# Allegro board WaterDetector_ver1.0.0.brd
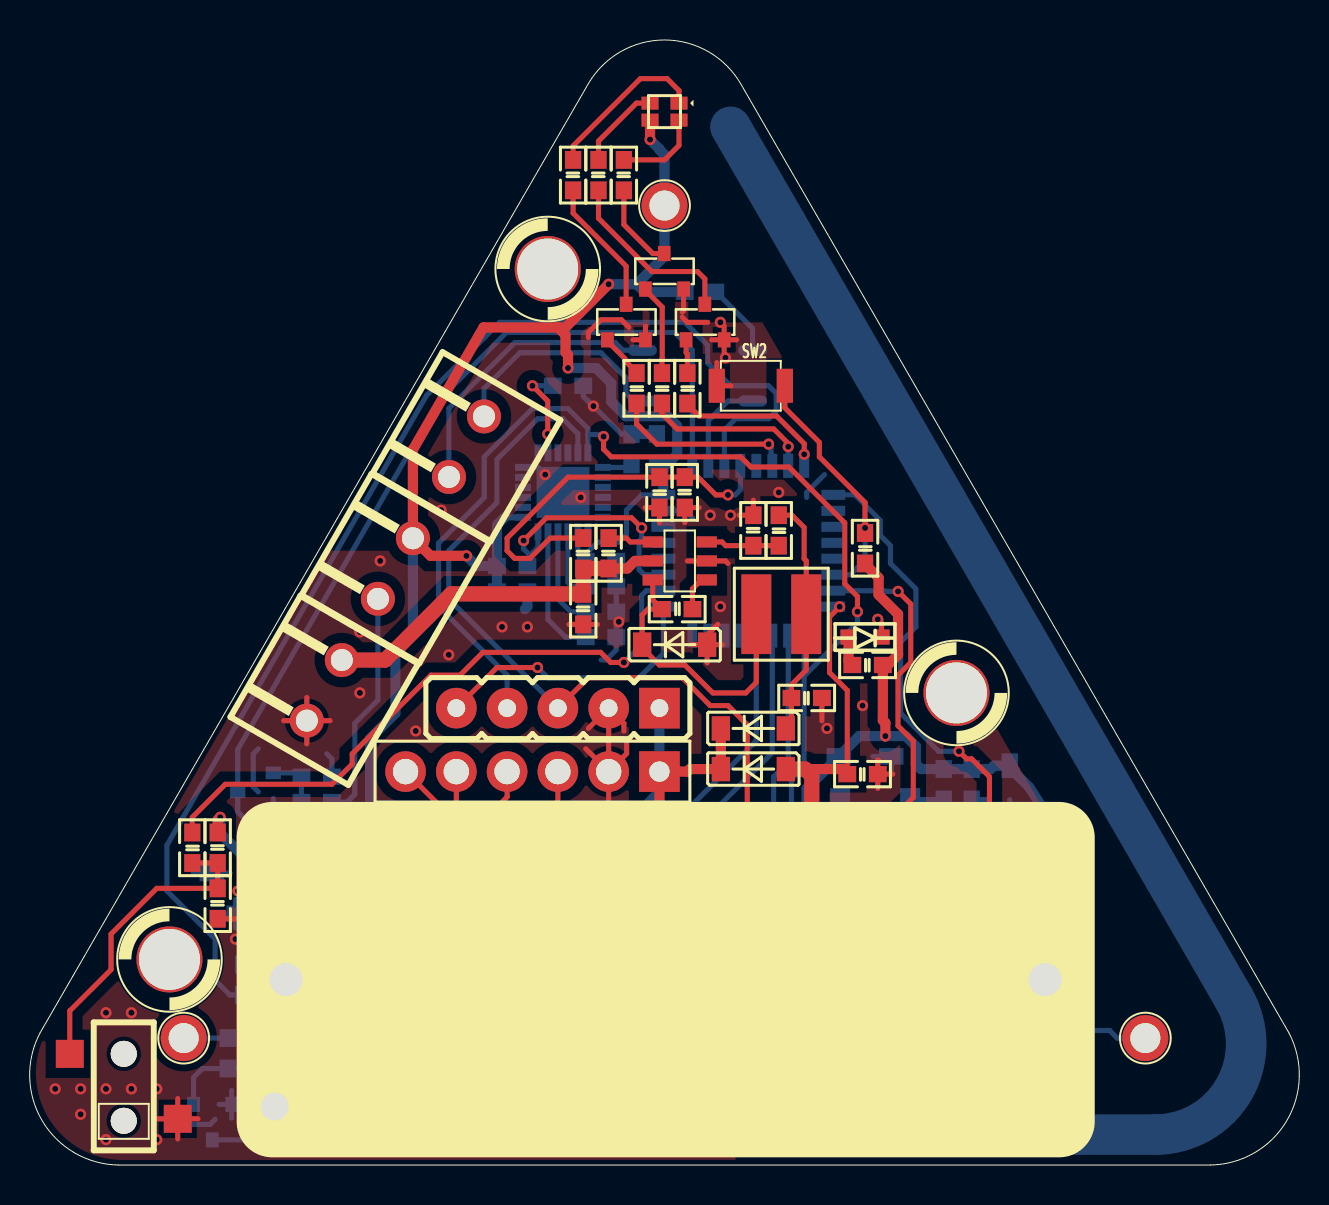
[diagram p0: board, top side]
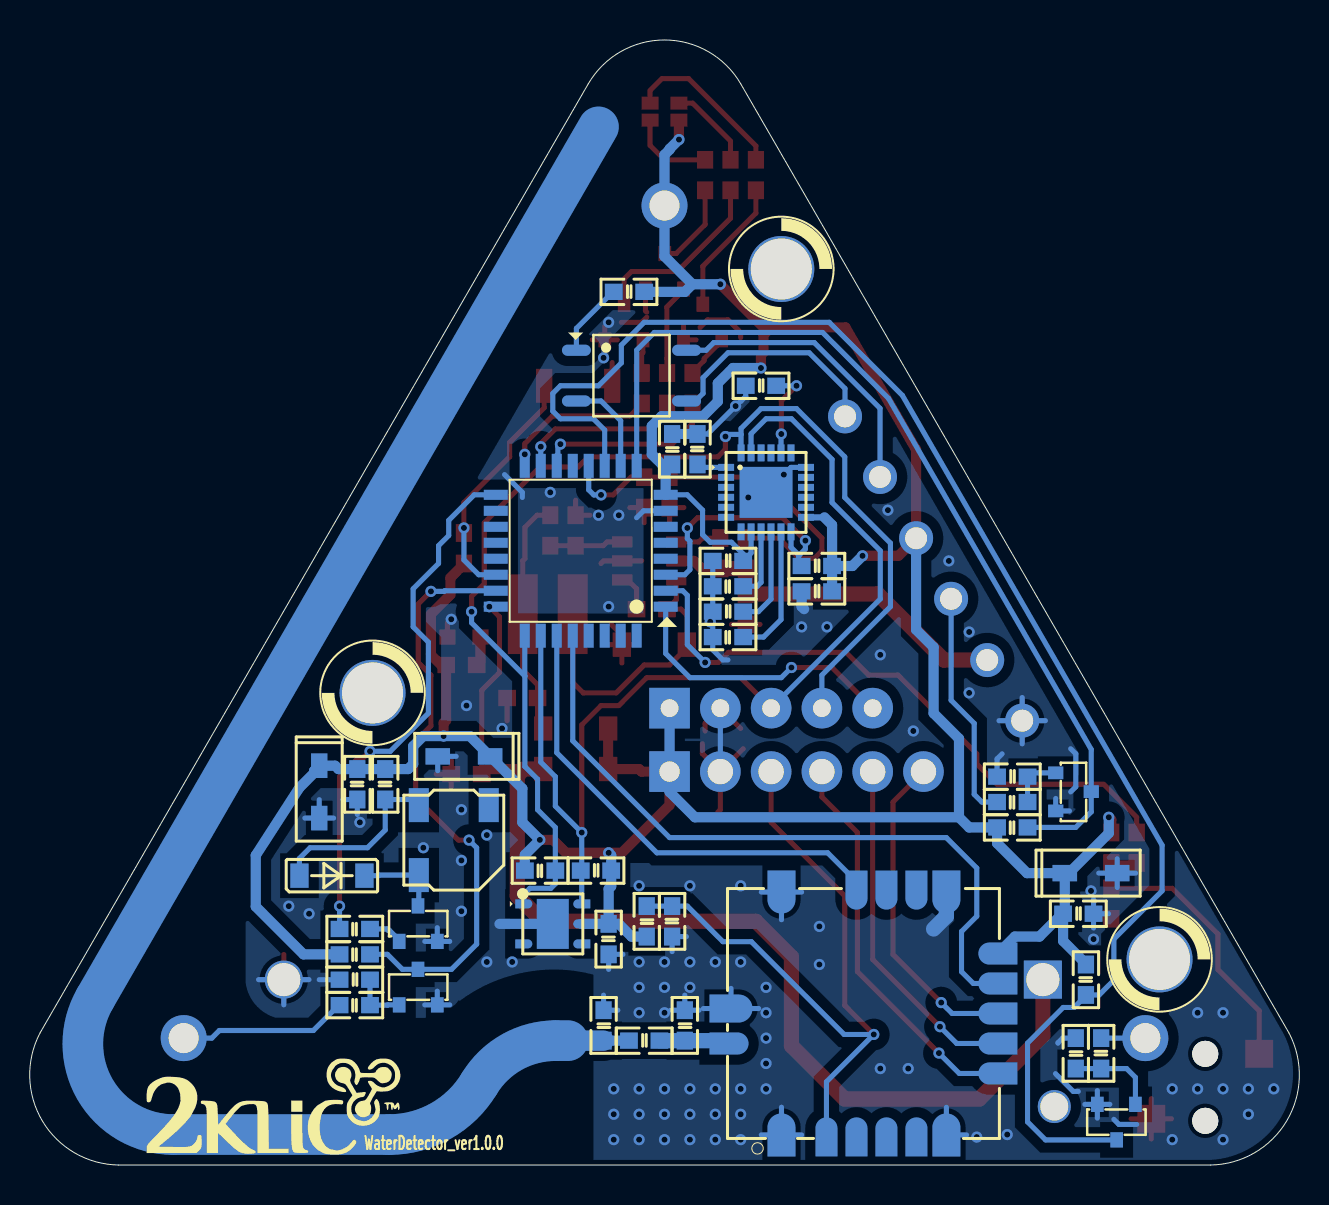
[diagram p1: board, bottom side, seen from below]

Outline 63.52 x 56.29 mm; copper layers: TOP, BOTTOM. Coordinates in mm from the lower left corner of the outline.
Outline path: 0.52,6.6 27.95,54.1 arc(31.76,56.29) 35.57,54.1 63,6.6 arc(62.88,2.2) 59.07,0 4.46,0 arc(0.64,2.2) 0.52,6.6

## Design rules (mm)
nets with their own width: min track width 0.254; nets GND

## Placement (name value [footprint] x y rotation side)
C1  10nF  [C0603]  32.4 27.81 180 top
C2  10uF/25V  [C0603]  27.7 27.81 270 top
C3  10uF  [C1206]  41.79 20.45 0 bottom
C4  22uF  [C0603]  38.87 23.37 0 top
C5  0.1uF  [C0603]  41.67 19.56 0 top
C6  0.1uF  [C0603]  11.06 12.57 0 bottom
C7  10uF  [C1206]  10.43 14.61 180 bottom
C8  10pF  [C0603]  30.75 6.99 90 bottom
C9  6pF  [C0603]  34.81 6.99 90 bottom
C10  0.1uF  [C0603]  31.38 35.81 90 bottom
C11  0.1uF  [C0603]  24.14 28.7 0 bottom
C12  2.2nF  [C0603]  26.94 38.99 0 bottom
C13  10nF  [C0603]  28.59 30.23 0 bottom
C14  0.1uF  [C0603]  28.59 27.69 0 bottom
C15  0.1uF  [C0603]  34.56 11.3 270 bottom
C16  0.1uF  [C0603]  47.13 19.05 270 bottom
C17  10u  [C1206]  49.03 18.67 270 bottom
C18  0.1uF  [C0603]  9.41 13.08 270 top
C19  0.1uF  [C0603]  32.78 33.66 270 top
C20  0.1uF  [C0603]  31.38 12.19 270 bottom
D1  1N5819  [SOD123]  36.21 21.84 0 top
D2  1N5819  [SOD123]  36.21 19.81 0 top
D3  1N5819  [SOD123]  32.27 26.04 0 top
D4  LED  [LED_0603]  41.79 26.42 0 top
D5  1N5819  [SOD123]  48.4 14.48 0 bottom
D6  Led GRB  [LED_RGB_0606]  31.76 52.7 270 top
H1  MetalLeg  [METALLEG]  31.76 48.01 0 top
H2  MetalLeg  [METALLEG]  7.71 6.35 0 top
H3  MetalLeg  [METALLEG]  55.82 6.35 0 top
J1  EXT_POWER_12V  [TERMINALBLOCK3P5MM]  14.74 23.75 240 top
J2  HEADER 6  [HEADER-6]  25.16 19.68 270 top
J3  EXT_LOAD  [TERMINALBLOCK3P5MM]  21.86 35.94 240 top
J4  EXT_SEN  [TERMINALBLOCK3P5MM]  18.3 29.84 240 top
J5  MCU PRG  [HEADER_5]  31.51 22.86 180 top
L1  4.7uH/1.5A  [IN4D_5X5]  37.6 27.56 270 top
L2  8.2nH  [C0603]  32.78 6.22 0 bottom
LS1  SPEAKER  [BUZZER_ST-0503]  42.3 16.26 270 bottom
MH1  HOLE 3mm  [MH_3MM_1]  25.92 44.83 0 top
MH2  HOLE 3mm  [MH_3MM_1]  7 10.29 0 top
MH3  HOLE 3mm  [MH_3MM_1]  46.37 23.62 0 top
NOREF  -  []  57.67 0.51 180 bottom
P1  CR123AHolder  [CR123A_HOLDER]  12.83 9.28 0 top
Q1  MMBT2222A  [SOT-23-3]  9.14 2.15 270 bottom
Q2  MMBT2222A  [SOT-23-3]  11.3 18.68 180 bottom
Q3  MMBT2222A  [SOT-23-3]  44.09 8.9 90 bottom
Q4  C1815  [SOT-23-3]  44.09 12.08 90 bottom
Q5  MMBT2222A  [SOT-23-3]  29.84 42.18 90 top
Q6  MMBT2222A  [SOT-23-3]  31.75 44.72 90 top
Q7  MMBT2222A  [SOT-23-3]  33.78 42.18 90 top
R1  10K  [R0603]  28.97 30.61 270 top
R2  49.9K  [R0603]  37.48 31.75 90 top
R3  240R  [R0603]  41.92 25.02 0 top
R4  9.53K  [R0603]  36.21 31.75 270 top
R5  330R  [R0603]  14.36 16.89 180 bottom
R6  330R  [R0603]  10.68 9.27 270 bottom
R7  330R  [R0603]  47.26 10.54 180 bottom
R8  1K  [R0603]  47.26 8 180 bottom
R9  1K  [R0603]  14.36 18.16 180 bottom
R10  1K  [R0603]  9.92 5.59 270 bottom
R11  1K  [R0603]  33.54 43.69 0 bottom
R12  10K  [R0603]  14.36 19.43 0 bottom
R13  10K  [R0603]  11.19 5.59 90 bottom
R14  10K  [R0603]  47.26 9.27 0 bottom
R16  10K  [R0603]  30.11 35.81 270 bottom
R17  10K  [R0603]  28.59 26.42 180 bottom
R19  10K  [R0603]  28.59 28.96 180 bottom
R20  10K  [R0603]  24.14 29.97 0 bottom
R21  10k  [R0603]  37.99 14.73 180 bottom
R22  10k  [R0603]  35.19 14.73 0 bottom
R23  27  [R0603]  45.73 19.05 270 bottom
R24  10K  [R0603]  9.41 15.88 270 top
R25  0R  [R0603]  8.14 15.88 90 top
R26  330R  [R0603]  47.26 11.81 180 bottom
R27  10K  [R0603]  41.79 30.86 90 top
R28  330R  [R0603]  27.19 49.53 270 top
R29  330R  [R0603]  29.73 49.53 270 top
R30  330R  [R0603]  28.46 49.53 270 top
R31  330R  [R0603]  30.37 38.86 90 top
R32  330R  [R0603]  31.64 38.86 90 top
R33  330R  [R0603]  32.9 38.86 90 top
R34  480R  [R0603]  31.51 33.66 90 top
R35  1.78K  [R0603]  27.7 30.61 270 top
R36  10K  [R0603]  32.65 12.19 90 bottom
SW1  DETECT SW  [TAMPERSW-ESE11MV1]  4.71 5.56 90 top
SW2  button_fsm  [B3U-1000P]  36.08 38.99 180 top
U1  AP3211  [SOT23-6]  32.52 30.23 180 top
U2  ZM5202  [ZM5202_D]  14.11 14.73 0 bottom
U3  CPC1017N  [CPC1017A]  33.41 40.77 180 bottom
U4  STM8L151X4  [LQFP-32]  35.95 30.73 0 bottom
U5  MPU-6050  [MPU-6000]  26.68 33.66 180 bottom
U6  SI7006-A20-IM  [SI7006]  37.35 12.06 180 bottom

## Library data of the parts
C1 C2 C4-C6 C19 = CAP NP
C3 C7 C17 = CAP
C8 = C-10pF/50V-SMD0805
C9 = C-6pF/50V-SMD0805
C10-C14 = CAP_USER
C15 = C-100nF/50V-SMD0805
C16 C18 C20 = Cap 0603
D1 D2 D5 = DIODE_0
D3 = SS34_0
D4 = LED_0
D6 = Led GRB_1
H1-H3 = MetalLeg
J1 J3 J4 = HEADER 2
J2 = HEADER 6
J5 = CON5
L1 = INDUCTOR
L2 = L-8.2nH-SMD0805
LS1 = SPEAKER_0
MH1-MH3 = MOUNTING HOLE
P1 = CR123AHolder
Q1-Q3 = 2SC1130_0
Q4-Q7 = Q2N1893_0
R1 R4 = RES-SM0402_0
R2 = RES-SM0402_1
R3 = RESD,0402,5%,1/16W,4.7K: tolerance: 5%
R5-R14 R34 R35 = R
R16 R17 R19 R20 = R-100R-SMD0805
R21 R22 = R-10k-SMD0805
R23-R33 R36 = Resistor 0603
SW1 = SW PUSHBUTTON-SPST-2
SW2 = button_fsm_0
U1 = PMIC_SOT23-6
U2 = ZM5202
U3 = CPC1017A
U4 = STM8L151K4_0
U5 = MPU-6000_1
U6 = SI7021

## Footprints (pads in the part's own frame, mm; a bottom-side part is the same pattern mirrored in y, then rotated)
B3U-1000P
  rect 0.813x1.702 smd: 1(-1.702,0) 2(1.702,0)
BUZZER_ST-0503
  rect 1.699x1.001 smd: 1(-1.75,-1.75) 2(1.75,-1.75) 3(-1.75,1.75)
C0603
  rect 0.889x0.813 smd: 1(-0.762,0) 2(0.762,0)
C1206
  rect 1.229x0.82 smd: 1(-1.311,0) 2(1.311,0)
CPC1017A
  oval 1.448x0.559 smd: 1(-2.756,0) 2(-2.756,-2.54) 3(2.756,-2.54) 4(2.756,0)
CR123A_HOLDER
  round 1.651 hole 1.397: (-0.572,-6.35)
  rect 1.905x1.905 hole 1.651: 1(0,0)
  round 1.905 hole 1.651: 2(37.973,0)
HEADER-6
  rect 2.032x2.032 hole 1.016: 1(0,6.35)
  round 2.032 hole 1.27: 2(0,3.81) 3(0,1.27) 4(0,-1.27) 5(0,-3.81) 6(0,-6.35)
HEADER_5
  rect 2.032x2.032 hole 0.889: 1(0,0)
  round 2.032 hole 0.889: 2(2.54,0) 3(5.08,0) 4(7.62,0) 5(10.16,0)
IN4D_5X5
  rect 3.988x1.499 smd: 1(0,-1.25) 2(0,1.25)
LED_0603
  rect 0.813x0.762 smd: 1(-0.826,0) 2(0.826,0)
LED_RGB_0606
  rect 0.65x0.851 smd: 1(-0.424,0.724) 2(0.424,0.724) 3(-0.424,-0.724) 4(0.424,-0.724)
LQFP-32
  rect 1.199x0.5 smd: 1(-4.249,2.799) 2(-4.249,1.999) 3(-4.249,1.199) 4(-4.249,0.399) 5(-4.249,-0.399) 6(-4.249,-1.199) 7(-4.249,-1.999) 8(-4.249,-2.799) 17(4.249,-2.799) 18(4.249,-1.999) 19(4.249,-1.199) 20(4.249,-0.399) 21(4.249,0.399) 22(4.249,1.199) 23(4.249,1.999) 24(4.249,2.799)
  rect 0.5x1.199 smd: 9(-2.799,-4.249) 10(-1.999,-4.249) 11(-1.199,-4.249) 12(-0.399,-4.249) 13(0.399,-4.249) 14(1.199,-4.249) 15(1.999,-4.249) 16(2.799,-4.249) 25(2.799,4.249) 26(1.999,4.249) 27(1.199,4.249) 28(0.399,4.249) 29(-0.399,4.249) 30(-1.199,4.249) 31(-1.999,4.249) 32(-2.799,4.249)
METALLEG
  round 2.301 hole 1.501: 1(0,0)
MH_3MM_1
  round 3.302 hole 3.048: 1(0,0)
MPU-6000
  rect 0.8x0.351 smd: 1(-1.999,1.25) 2(-1.999,0.749) 3(-1.999,0.249) 4(-1.999,-0.249) 5(-1.999,-0.749) 6(-1.999,-1.25) 13(1.999,-1.25) 14(1.999,-0.749) 15(1.999,-0.249) 16(1.999,0.249) 17(1.999,0.749) 18(1.999,1.25)
  rect 0.351x0.851 smd: 7(-1.25,-1.976) 8(-0.749,-1.976) 9(-0.249,-1.976) 10(0.249,-1.976) 11(0.749,-1.976) 12(1.25,-1.976) 19(1.25,1.976) 20(0.749,1.976) 21(0.249,1.976) 22(-0.249,1.976) 23(-0.749,1.976) 24(-1.25,1.976)
  rect 2.649x2.55 smd: 25(0,0)
R0603
  rect 0.889x0.813 smd: 1(-0.762,0) 2(0.762,0)
SI7006
  custom 0.851x0.452 smd: 1(-1.45,1.001) 2(-1.45,0) 3(-1.45,-1.001) 4(1.45,-1.001) 5(1.45,0) 6(1.45,1.001)
  rect 1.6x2.499 smd: 7(0,0)
SOD123
  rect 0.914x1.219 smd: 1(1.626,0) 2(-1.626,0)
SOT23-6
  rect 1.016x0.559 smd: 1(-1.351,0.95) 2(-1.351,0) 3(-1.351,-0.95) 4(1.351,-0.95) 5(1.351,0) 6(1.351,0.95)
SOT-23-3
  rect 0.762x0.635 smd: 1(-0.889,0.94) 2(-0.889,-0.965) 3(0.889,0)
TAMPERSW-ESE11MV1
  rect 1.4x1.4 smd: 1(0,2.7) 4(-3.251,-2.7)
  round 1.3 hole 1.3: 2(-3.35,0) 3(0,0)
TERMINALBLOCK3P5MM
  round 1.699 hole 1.1: 1(-1.75,0) 2(1.75,0)
ZM5202_D
  custom 1.402x2.151 smd: 1(11.801,13.226) 6(3.551,13.226) 12(3.551,1.074) 16(11.801,1.074)
  custom 1.102x1.951 smd: 2(9.55,13.325) 3(8.049,13.325) 4(6.551,13.325) 5(5.05,13.325) 13(5.05,0.975) 14(6.551,0.975) 15(8.049,0.975)
  custom 1.951x1.102 smd: 7(0.975,10.15) 8(0.975,8.651) 9(0.975,7.15) 10(0.975,5.649) 11(0.975,4.15) 18(14.425,8.651)
  custom 2.151x1.402 smd: 17(14.326,6.901)

## Nets
3V3: C3.1 C6.2 C7.1 C10.1 C11.1 C13.1 C15.1 C16.1 C17.1 D1.2(K) D2.2(K) D6.4(+) H1.1 J2.1 J4.1 J5.1 R3.2 R5.1 R6.1 R7.1 R11.1 R20.1 R21.1 R22.1 R23.1 R24.1 R27.1 R36.1 U2.11(VDD) U4.8(VDD1/VDDA/VREF+) U5.8(VLOGIC) U5.13(VDD) U6.5(VDD)
12V: C2.1 J1.1 R1.2 R35.2 U1.5(IN)
GND: C2.2 C3.2 C4.2 C5.2 C6.1 C7.2 C8.2 C9.2 C10.2 C11.2 C12.2 C13.2 C14.2 C15.2 C16.2 C17.2 C18.2 C19.2 C20.2 D3.1(ANODE) D4.2(CATHODE) J1.2 J2.2 J5.2 P1.2(-) Q1.2(E) Q2.2(E) Q3.2(E) Q4.2(E) Q5.2(E) Q6.2(E) Q7.2(E) R4.1 R12.2 R13.2 R14.2 R16.1 R17.1 R19.1 R34.1 SW1.4 SW2.2 U1.2(GND) U2.1(GND#1) U2.6(GND#6) U2.12(GND#12) U2.16(GND#16) U2.17(GND#17) U4.7(VSS1/VSSA/VREF-) U5.18(GND) U5.25(GND25) U6.2(GND) U6.7(PAD)
V3V3_SAMPLE: C5.1 D2.1(A) P1.1(+) U4.24(TIM1_CH1N/ADC1_IN7/RTC_ALARM/VR)
V12V_SAMPLE: C19.1 R34.2 R35.1 U4.12(PD3/TIM1_ETR/ADC1_IN19/COMP1_IN)
ALARM: U3.2(-) U4.10(PD1/TIM1_CH3N/ADC1_IN21/COMP2_I)
ANTEN: C9.1 L2.2
BUTTON: R27.2 SW2.1 U4.22(TIM1_CH3/ADC1_IN9/COMP1_INP/PD5)
BUZZER: R26.1 U4.17(ADC1_IN14/COMP1_INP/DAC_OUT)
EXT_SEN: Q2.3(C) R5.2 U4.9(PD0/TIM3_CH2/ADC1_IN22/COMP_INP)
HUMIDITY_SEN_SCL: J5.3 R22.2 U4.26(I2C1_SCL) U5.23(SCL) U6.6(SCL)
HUMIDITY_SEN_SDA: J5.4 R21.2 U4.25(I2C1_SDA) U5.24(SDA) U6.1(SDA)
LED_B: R33.1 U4.16(PB3/TIM1_CH2N/ADC1_IN15/COMP1_I)
LED_G: R32.1 U4.15(PB2/TIM2_CH2/ADC1_IN16/COMP1_IN)
LED_R: R31.1 U4.14(PB1/TIM3_CH1/ADC1_IN17/COMP1_IN)
MPU-INT: R20.2 U4.3(PA3/OSC_OUT) U5.12(INT)
NRST: J5.5 U4.1(PA1/NRST)
RF: C8.1 L2.1 U2.18(RF)
STM_UART_RX: U2.15(UART_TX) U4.27(UART1_RX/LCD_SEG22/ADC1_IN6/COM)
STM_UART_TX: U2.10(UART_RX) U4.28(USART1_TX/ADC1_IN5/OMP1_INP/OMP)
TAMPER: R25.2 U4.2(PA2/OSC_IN)
WATER_SEN_1: Q1.3(C) R6.2 U4.11(PD1/TIM1_CH1/ADC1_IN20/COMP1_IN)
WATER_SEN_2: Q3.3(C) R7.2 U4.23(TIM1_BKIN/ADC1_IN8/RTC_CALI/VRE)
ZWAVE_RESETN: C20.1 J2.3 R36.2 U2.2(RESET_N)
ZWAVE_SPI_MISO: J2.4 U2.7(SPI_MISO)
ZWAVE_SPI_MOSI: J2.6 U2.9(SPI_MOSI)
ZWAVE_SPI_SCLK: J2.5 U2.8(SPI_SCK)
N1650025: Q1.1(B) R10.2 R13.1
N1687500: Q3.1(B) R8.2 R14.1
N1687938: H2.1 R10.1
N1687950: H3.1 R8.1
N1694456: Q2.1(B) R9.2 R12.1
N1694970: Q7.3(C) R30.2
N1694974: Q6.3(C) R29.2
N1695042: Q5.1(B) R31.2
N1695078: Q5.3(C) R28.2
N1695082: Q6.1(B) R32.2
N1695154: Q7.1(B) R33.2
N1697652: C12.1 U5.20(CPOUT)
N1701027: C14.1 U5.10(REGOUT)
N1703483: J4.2 R9.1
N1721501: D5.2(K) LS1.2 Q4.3(C)
N1721505: D5.1(A) LS1.1 R23.2
N1750684: C18.1 R24.2 R25.1 SW1.1
N1759739: D6.1(RED) R28.1
N1759748: D6.3(BLUE) R30.1
N1759754: D6.2(GREEN) R29.1
N1771086: C4.1 D1.1(A) L1.2 R2.2
N1771226: C1.2 D3.2(CATHODE) L1.1 U1.6(SW)
N1771238: C1.1 U1.1(BS)
N1771286: R2.1 R4.2 U1.3(FB)
N1771536: R1.1 U1.4(EN)
N1781404: R19.2 U5.9(AD0)
N1798198: D4.1(ANODE) R3.1
N1800565: J3.2 U3.4(LOAD2)
N1800577: J3.1 U3.3(LOAD1)
N16974520: R16.2 U5.1(CLKIN)
N17183070: R11.2 U3.1(+)
N17216350: Q4.1(B) R26.2
N169745210: R17.2 U5.11(FSYNC)

Pads without a net: LS1 3; MH1 1; MH2 1; MH3 1; SW1 2 3; U2 3 4 5 13 14; U4 4 5 6 13 18 19 20 21 29 30 31 32; U5 2 3 4 5 6 7 14 15 16 17 19 21 22; U6 3 4

## Via types
v1: diameter 0.559, hole 0.305, TOP to BOTTOM, 116 vias

## Routing (per net, layer and track width the routed paths; a pad name or vN(x,y) marks a point on that pad's centre or on a via; arc(x,y) is an arc through that point)
3V3: length 179.7
  TOP w0.508: 26.43,41.91 26.81,41.91 v1(28.97,44.07) ; 26.43,41.91 26.81,41.53 26.81,40.67 26.94,40.54 v1(26.94,39.88) ; 26.43,41.91 22.71,41.91 19.19,35.81 19.18,35.8 19.18,31.36 20.06,30.48 v1(21.86,30.48) ; D1.2 D2.2 33.03,19.81 32.9,19.68 J2.1 31.51,18.01 33.9,15.62 v1(34.56,15.62) 36.69,15.62 37.34,16.27 v1(38,16.27) ; R27.1 41.79,30.06 42.47,29.38 42.47,28.53 43.45,27.56 43.45,25.53 42.94,25.02 R3.2 42.68,22.25 42.81,22.12 v1(42.81,21.46) ; v1(9.54,17.4) 9.41,17.27 R24.1 ; v1(31.04,51.31) D6.4
  BOTTOM w0.254: U4.8 30.62,33.53 29.86,32.77 29.86,31.54 29.48,31.16 28.41,31.16 27.82,30.57 C13.1 27.43,30.62 U5.8
  BOTTOM w0.305: 23.76,32.41 U5.13
  BOTTOM w0.508: U2.11 14.24,11.43 13,11.43 11.86,12.57 C6.2 ; U4.8 31.7,34.73 31.38,35.05 31.89,35.05 32.4,35.56 32.4,36.98 31.91,37.47 29.83,37.47 29.1,38.2 29.1,39.12 28.33,39.88 v1(26.94,39.88) ; v1(31.04,51.31) 31.51,50.84 31.51,50.8 31.76,50.55 H1.1 31.76,45.47 30.37,44.07 ; R21.1 38.75,15.52 v1(38,16.27) 38.87,17.14 38.87,18.84 C3.1 41.5,21.46 v1(42.81,21.46) 43.83,21.46 44.33,20.95 44.33,20.07 44.59,19.81 R23.1 C16.1 48.07,19.81 48.24,19.98 C17.1 49.29,19.73 49.29,19.62 50.02,18.89 52.21,15.49 52.21,12.93 49.82,10.54 R7.1 ; 23.76,32.41 23.38,32.02 R20.1 ; 30.37,44.07 30.75,43.69 R11.1 ; 30.37,44.07 v1(28.97,44.07) ; R20.1 22.36,29.97 v1(21.86,30.48) ; R20.1 C11.1 ; 34.56,12.06 34.05,12.06 33.41,11.43 R36.1 ; 34.56,12.06 U6.5 ; 34.56,12.06 34.56,13.82 34.43,13.94 R22.1 34.43,15.49 v1(34.56,15.62) ; J5.1 J2.1 31.51,18.67 30.24,17.4 17.03,17.4 ; 19.18,31.36 19.18,26.78 18.3,25.91 18.3,22.61 17.03,21.34 17.03,17.4 ; C6.2 11.82,12.6 11.74,12.68 C7.1 ; C6.2 11.82,11.21 10.68,10.07 10.68,10.03 ; C7.1 13.63,14.61 15.13,16.1 R5.1 16.52,16.89 17.03,17.4 ; C7.1 11.53,14.61 9.54,16.6 v1(9.54,17.4)
12V: length 18.4
  TOP w0.508: U1.5 30.28,30.23 29.9,29.84 R1.2
  TOP w0.762: 15.62,25.27 17.78,25.27 21.09,28.57 C2.1 R35.2 R1.2
GND: length 134.4
  TOP w0.254: v1(42.43,27.3) 42.62,27.11 D4.2 ; 27.95,41.4 27.95,41.66 28.59,42.29 29.6,42.29 29.98,41.91 ; 9.41,12.32 10.3,12.32 ; J5.2 29.73,22.1 29.73,21.72 ; J5.2 27.95,21.84 ; J5.2 J2.2 ; 28.41,27.05 C2.2 26.98,27.05 ; Q7.2 34.75,41.98 ; Q7.2 34.75,40.6 ; Q7.2 35.37,41.29 ; Q7.2 34.12,41.29 ; J2.2 29.87,20.58 29.87,21.07 ; J2.2 27.82,20.83 ; J2.2 28.97,17.78 29.1,17.65 ; 7.41,1.3 SW1.4 ; SW1.4 7.41,3.32 ; SW1.4 6.4,2.31 ; SW1.4 8.42,2.31 ; 33.49,32.89 C19.2 32.78,32.14 ; C5.2 43.18,19.56 ; C5.2 42.43,20.27 ; C5.2 42.43,18.84 ; 13.87,21.07 13.87,22.23 ; 13.87,22.23 12.71,22.23 ; 13.87,22.23 13.87,23.39 ; 13.87,22.23 15.03,22.23 ; 34.43,27.05 33.9,26.52 D3.1 ; 32.9,30.23 U1.2 34.81,30.23 34.94,30.1 ; 33.13,26.04 D3.1 ; D3.1 34.66,26.04 ; D3.1 33.9,25.12 ; Q6.2 32.71,42.74 32.65,42.67 ; 33.92,42.16 32.9,42.16 32.65,42.42 ; 35.09,38.99 SW2.2 34.38,40.15 ; 30.18,41.29 Q5.2 30.81,41.98 ; 36.21,33.26 R4.1 35.49,32.51 ; 49.55,9.28 P1.2 ; P1.2 50.81,8.02 ; P1.2 50.81,10.54 ; P1.2 52.07,9.28 ; 30.79,32.89 R34.1 31.51,32.14 ; C4.2 39.64,22.23
  BOTTOM w0.254: 42.5,11.19 Q4.2 ; Q4.2 43.75,11.19 ; Q4.2 43.13,11.88 ; 9.55,12.57 C6.1 ; C6.1 10.3,11.86 ; C6.1 10.3,13.29 ; 34.81,8.5 C9.2 34.1,7.75 ; 30.67,11.43 C20.2 31.38,10.68 ; C12.2 27.7,38.46 27.93,38.23 27.95,38.23 v1(28.21,37.97) 29.6,36.58 R16.1 ; 9.28,2.29 9.03,2.03 8.14,2.03 ; 10.11,2.35 Q1.2 ; Q1.2 10.73,3.04 ; Q1.2 9.48,3.04 ; Q1.2 10.11,3.72 ; 17.66,12.45 17.66,12.32 ; 50.81,8.02 P1.2 ; P1.2 49.55,9.28 ; P1.2 52.07,9.28 ; 30.03,7.75 C8.2 ; C8.2 31.46,7.75 ; C8.2 30.75,8.5 ; U4.7 32.81,32.73 33.16,32.38 ; 13.87,22.23 15.03,22.23 ; 13.87,22.23 13.87,21.07 ; 13.87,22.23 13.87,23.39 ; 13.87,22.23 12.71,22.23 ; C7.2 10.04,14.61 ; C7.2 8.19,14.61 ; C7.2 9.12,15.32 ; C7.2 9.12,13.89 ; 43.11,19.73 C3.2 42.18,20.45 ; 27.05,7.83 U2.17 ; U2.17 29.82,7.83 ; U2.17 28.43,8.84 ; R14.2 49.03,9.27 ; C17.2 49.75,17.36 ; C17.2 49.03,18.28 ; C17.2 48.32,17.36 ; R13.2 11.85,6.35 12.08,6.12 12.08,6.1 ; 14.87,20.57 15.13,20.32 R12.2 ; 25.91,12.27 U2.16 ; U2.16 26.92,13.66 ; U2.16 24.9,13.66 ; v1(27.57,33.4) 27.32,33.66 U5.25 v1(25.79,34.54) 25.43,34.9 U5.18 ; 47.84,18.29 C16.2 47.13,17.54 ; 39.76,34.54 38.87,33.66 38.87,33.4 ; 16.65,1.51 U2.6 17.66,2.89 ; 12.19,18.34 Q2.2 11.5,17.72 ; 11.06,3.68 11.32,3.68 12.2,4.57 ; 11.44,18.67 11.19,18.92 11.19,20.57 11.44,20.83 ; J5.2 J2.2 ; 24.9,1.51 U2.1 ; U2.1 25.91,2.89 ; U2.1 26.92,1.51 ; C13.2 R19.1 C14.2 29.35,27.3 v1(29.48,27.18) 29.35,27.05 R17.1 29.35,25.78 28.84,25.27 28.59,25.27 ; 42.5,8.01 Q3.2 ; Q3.2 43.13,8.7 ; Q3.2 43.75,8.01 ; 34.56,9.79 C15.2 33.84,10.54
  BOTTOM w0.508: C11.2 24.9,27.94 24.78,27.81 ; 40.02,12.06 U6.2 U6.7 ; C10.2 R16.1
  BOTTOM w0.762: U2.12 17.66,12.45 18.3,11.81
  vias: v1(1.28,3.81) v1(2.55,3.81) v1(2.55,2.54) v1(3.82,7.62) v1(3.82,3.81) v1(3.82,1.27) v1(5.09,7.62) v1(5.09,3.81) v1(6.36,3.81) v1(6.36,1.27) v1(10.3,11.3) v1(10.43,13.72) v1(14.62,1.52) v1(16.14,1.4) v1(16.52,26.67) v1(16.52,23.62) v1(17.54,30.23) v1(19.32,21.72) v1(19.57,4.83) v1(20.59,32.77) v1(20.97,25.53) v1(20.97,4.83) v1(23.63,26.92) v1(24.02,11.94) v1(24.02,10.03) v1(24.9,26.92) v1(26.68,8.89) v1(26.68,7.62) v1(26.68,6.35) v1(26.68,5.08) v1(26.68,3.81) v1(27.95,13.97) v1(27.95,10.16) v1(27.95,3.81) v1(27.95,2.54) v1(27.95,1.27) v1(29.22,10.16) v1(29.22,3.81) v1(29.22,2.54) v1(29.22,1.27) v1(30.49,13.97) v1(30.49,10.16) v1(30.49,8.89) v1(30.49,3.81) v1(30.49,2.54) v1(30.49,1.27) v1(31.76,10.16) v1(31.76,8.89) v1(31.76,7.62) v1(31.76,3.81) v1(31.76,2.54) v1(31.76,1.27) v1(33.03,13.97) v1(33.03,10.16) v1(33.03,8.89) v1(33.03,7.62) v1(33.03,3.81) v1(33.03,2.54) v1(33.03,1.27) v1(34.05,32.51) v1(34.3,3.81) v1(34.3,2.54) v1(34.3,1.27) v1(34.56,42.16) v1(34.56,27.94) v1(34.81,40.39) v1(35.06,32.51) v1(37.48,33.66) v1(39.38,10.16) v1(39.89,21.84) v1(40.65,16.51) v1(40.65,10.16) v1(41.67,22.99) v1(41.92,17.78) v1(41.92,15.24) v1(41.92,12.7) v1(43.83,15.88) v1(47,17.14) v1(49.54,12.57) v1(50.56,12.95)
V3V3_SAMPLE: length 56.2
  TOP w0.254: v1(40.53,27.93) 40.02,27.43 40.02,24.64 40.91,23.75 C5.1
  TOP w0.508: 38.8,19.81 40.65,19.81 C5.1
  TOP w0.762: D2.1 38.8,19.81 39.13,19.48 39.13,13.46 37.86,12.19 27.19,12.19 25.41,10.41 25.41,5.97 22.75,3.3 16.02,3.3 12.83,6.48 P1.1
  BOTTOM w0.254: v1(40.53,27.93) U4.24
V12V_SAMPLE: length 19.6
  TOP w0.254: R35.1 26.05,31.37 25.03,30.35 24.27,30.35 23.89,30.73 23.89,31.37 26.94,34.42 R34.2 C19.1 33.44,34.42 34.33,33.53 v1(34.94,33.53)
  BOTTOM w0.254: v1(34.94,33.53) 35.3,33.53 35.55,33.78 U4.12
ALARM: length 4.9
  BOTTOM w0.254: U3.2 34.94,38.23 33.95,37.24 U4.10
ANTEN: length 84.3
  BOTTOM w0.508: L2.2 C9.1
  BOTTOM w1.016: 36.59,6.22 C9.1
  BOTTOM w2.032: 36.59,6.22 37.21,6.22 arc(39.41,5.65) 41.03,4.06 arc(42.95,2.2) 45.53,1.52 56.33,1.52 arc(60.25,3.79) 60.25,8.33 35.06,51.94
BUTTON: length 12.3
  TOP w0.254: v1(41.79,31.88) 41.79,33.15 39.51,35.43 39.51,36.16 37.78,37.88 SW2.1
  BOTTOM w0.254: U4.22 41.06,29.54 41.79,30.27 v1(41.79,31.88)
BUZZER: length 27
  TOP w0.254: v1(46.49,20.7) 46.87,20.32 47.13,20.32 48.02,19.43 v1(48.02,12.95)
  BOTTOM w0.254: R26.1 v1(48.02,12.95) ; U4.17 41.28,33.53 42.56,32.26 42.56,31.5 43.07,30.99 43.07,30.1 44.33,28.83 44.33,26.92 43.57,26.16 43.57,22.61 45.48,20.7 v1(46.49,20.7)
EXT_SEN: length 47
  BOTTOM w0.254: R5.2 11.19,16.89 10.41,17.67 Q2.3 10.41,20.79 20.55,38.35 23.85,41.66 32.27,41.66 33.15,40.77 U4.9
HUMIDITY_SEN_SCL: length 52.7
  TOP w0.254: v1(35.9,16.64) 35.9,22.02 34.94,22.99 34.05,22.99 32.65,24.38 27.95,24.38 J5.3
  BOTTOM w0.254: U5.23 27.43,36.59 26.68,37.34 25.41,37.34 23.38,35.31 23.38,33.15 20.97,30.73 20.97,28.32 J5.3 ; 35.9,14.78 R22.2 ; 35.9,14.78 v1(35.9,16.64) 37.22,17.96 37.22,19.43 37.95,20.16 U4.26 ; 35.9,14.78 35.9,13.07 U6.6
HUMIDITY_SEN_SDA: length 62.2
  TOP w0.254: v1(28.71,36.45) 28.71,35.81 29.1,35.43 35.57,35.43 36.08,34.92 37.99,34.92 40.78,32.13 40.78,29.08 41.41,28.45 v1(41.41,27.69)
  BOTTOM w0.254: 27.93,36.56 U5.24 ; 27.93,36.56 27.93,36.85 26.94,37.85 25.16,37.85 22.75,35.43 22.75,33.4 20.46,31.11 20.46,27.94 23.89,24.51 J5.4 ; 27.93,36.56 28.61,36.56 v1(28.71,36.45) ; 38.75,24.47 41.41,27.13 v1(41.41,27.69) ; 38.75,24.47 38.75,24.47 38.75,19.94 38.11,19.3 38.11,17.78 37.22,16.89 R21.2 37.22,14.07 37.45,13.84 38.5,13.84 38.8,13.55 38.8,13.07 U6.1 ; 38.75,24.47 U4.25
LED_B: length 7.8
  TOP w0.254: R33.1 32.9,38.06 33.49,37.48 37.37,37.48 38.75,36.09 v1(38.75,35.56)
  BOTTOM w0.254: v1(38.75,35.56) U4.16
LED_G: length 8.6
  TOP w0.254: v1(37.95,35.94) 37.95,36.1 37.23,36.83 32.4,36.83 31.64,37.59 R32.1
  BOTTOM w0.254: U4.15 v1(37.95,35.94)
LED_R: length 9.2
  TOP w0.254: v1(36.97,36.07) 31.38,36.07 30.37,37.08 R31.1
  BOTTOM w0.254: U4.14 37.15,35.5 37.1,35.56 37.1,35.94 v1(36.97,36.07)
MPU-INT: length 12.9
  TOP w0.254: v1(30.62,31.88) 30.11,32.38 25.86,32.38 v1(24.71,31.24)
  BOTTOM w0.254: U4.3 30.75,29.54 30.49,29.79 30.49,31.22 30.62,31.34 v1(30.62,31.88) ; U5.12 25.43,30.91 25.03,30.51 ; 25.03,30.51 25.05,30.48 25.05,30.12 R20.2 ; 25.03,30.51 24.71,30.82 v1(24.71,31.24)
NRST: length 14.2
  TOP w0.254: v1(25.41,24.89) 23.38,24.89 J5.5
  BOTTOM w0.254: U4.1 31.7,25.6 30.49,24.38 25.92,24.38 v1(25.41,24.89)
RF: length 3.5
  BOTTOM w0.762: U2.18 28.68,6.22 C8.1 L2.1
STM_UART_RX: length 23.9
  BOTTOM w0.254: U2.15 22.16,14.18 23.6,15.62 32.14,15.62 37.15,20.63 U4.27
STM_UART_TX: length 35.7
  BOTTOM w0.254: U2.10 16.31,9.08 16.9,9.67 16.9,11.68 16.14,12.45 16.14,14.86 17.67,16.38 31.51,16.38 36.35,21.23 U4.28
TAMPER: length 31.2
  TOP w0.254: v1(29.73,25.15) 29.07,25.15 28.56,25.65 22.68,25.65 21.54,24.51 20.08,24.51 16.14,20.57 16.14,20.07 15.13,19.05 9.79,19.05 8.14,17.4 R25.2
  BOTTOM w0.254: v1(29.73,25.15) 30.62,26.04 30.62,28.5 30.85,28.74 U4.2
WATER_SEN_1: length 74.8
  BOTTOM w0.254: Q1.3 12.7,1.26 13.6,2.16 13.6,6.1 11.82,7.88 11.27,7.88 10.68,8.47 R6.2 10.02,8.51 9.28,9.25 9.28,11.3 6.87,13.72 6.87,16 19.86,38.51 23.52,42.16 32.78,42.16 33.92,41.02 33.92,40.13 35.06,38.99 36.97,38.99 37.35,38.61 37.35,37.72 36.97,37.34 35.32,37.34 34.75,36.77 U4.11
WATER_SEN_2: length 29.5
  TOP w0.254: v1(43.45,28.7) 44.08,28.07 44.08,25.15 43.45,24.51 43.45,21.97 44.21,21.21 44.21,18.39 42.07,16.26 v1(41.54,16.26)
  BOTTOM w0.254: U4.23 42.75,28.74 42.79,28.7 v1(43.45,28.7) ; R7.2 45.63,10.54 44.88,9.79 Q3.3 42.42,9.79 41.16,11.05 41.16,15.88 v1(41.54,16.26)
ZWAVE_RESETN: length 35.4
  TOP w0.254: v1(21.29,6.53) 22.75,7.99 22.75,13.46 26.43,17.14 J2.3
  BOTTOM w0.254: R36.2 30.62,12.95 28.84,11.18 27.42,11.18 22.78,6.53 v1(21.29,6.53) 23.66,4.17 U2.2
ZWAVE_SPI_MISO: length 19.9
  TOP w0.254: v1(18.03,5.6) 22.11,9.68 22.11,16.64 23.89,18.41 J2.4
  BOTTOM w0.254: v1(18.03,5.6) 17.01,4.58 U2.7
ZWAVE_SPI_MOSI: length 16.2
  TOP w0.254: v1(17.92,8.13) 20.33,10.54 20.33,18.16 J2.6
  BOTTOM w0.254: U2.9 17.37,7.58 v1(17.92,8.13)
ZWAVE_SPI_SCLK: length 17.4
  TOP w0.254: v1(17.98,6.92) 21.35,10.29 J2.5
  BOTTOM w0.254: v1(17.98,6.92) 17.14,6.08 U2.8
N1650025: length 4.5
  BOTTOM w0.254: Q1.1 8.2,4.38 8.65,4.83 R10.2 R13.1
N1687500: length 2.7
  BOTTOM w0.254: Q3.1 45.61,8.01 45.62,8 R8.2 R14.1
N1687938: length 2.2
  BOTTOM w0.254: R10.1 H2.1
N1687950: length 8.5
  BOTTOM w0.254: H3.1 54.41,6.35 54.03,6.73 49.33,6.73 48.06,8 R8.1
N1694456: length 2.8
  BOTTOM w0.254: Q2.1 13.35,19.62 13.6,19.37 ; 13.6,19.37 R12.1 ; 13.6,19.37 R9.2
N1694970: length 9.2
  TOP w0.254: R30.2 28.46,47.37 31.12,44.7 33.41,44.7 33.78,44.34 Q7.3
N1694974: length 4.3
  TOP w0.254: R29.2 29.73,47.05 31.18,45.61 Q6.3
N1695042: length 2.3
  TOP w0.254: R31.2 30.37,39.66 29.78,40.25 29.78,40.35 28.9,41.22 Q5.1
N1695078: length 6.8
  TOP w0.254: Q5.3 29.84,44.97 27.19,47.62 R28.2
N1695082: length 4.6
  TOP w0.254: 31.64,39.62 31.64,40.32 31.65,40.34 31.65,42.93 30.81,43.76 Q6.1
N1695154: length 1.7
  TOP w0.254: Q7.1 32.84,40.65 32.9,40.59 R33.2
N1697652: length 4.7
  TOP w0.254: v1(25.16,38.99) 25.92,38.23 v1(25.92,36.58)
  BOTTOM w0.254: U5.20 25.93,36.44 25.92,36.45 v1(25.92,36.58) ; v1(25.16,38.99) C12.1
N1701027: length 5
  BOTTOM w0.254: C14.1 27.07,27.69 26.43,28.32 U5.10
N1703483: length 11.6
  BOTTOM w0.254: R9.1 15.88,18.16 16.27,18.54 16.27,22.1 17.42,23.25 17.42,28.33
N1721501: length 4.3
  BOTTOM w0.254: D5.2 46.06,14.48 46.03,14.51 LS1.2 44.05,13.01 Q4.3
N1721505: length 9.1
  BOTTOM w0.254: D5.1 50.02,15.34 49.49,15.88 46.62,15.88 45.73,16.76 R23.2 44.33,18.29 LS1.1
N1750684: length 15.7
  TOP w0.254: R25.1 R24.2 C18.1 6.36,13.84 4.08,11.56 4.08,9.78 2.01,7.71 SW1.1
N1759739: length 8.3
  TOP w0.254: D6.1 32.49,53.76 31.89,54.36 30.56,54.36 27.19,50.99 R28.1
N1759748: length 4.3
  TOP w0.254: D6.3 30.36,53.13 28.46,51.23 R30.1
N1759754: length 4.3
  TOP w0.254: D6.2 32.49,51.02 31.76,50.29 R29.1
N1771086: length 12
  TOP w0.254: D1.1 38.11,22.12 C4.1 38.11,24.03 38.85,24.77 L1.2 38.85,30.23 38.75,30.34 38.75,31.9 38.14,32.51 R2.2
N1771226: length 14.7
  TOP w0.254: L1.1 36.35,24.15 35.83,23.62 34.18,23.62 32.78,25.02 31.51,25.02 30.64,25.88 D3.2 30.64,27.52 30.94,27.81 C1.2 31.17,28.28 U1.6
N1771238: length 1.9
  TOP w0.254: U1.1 33.61,29.28 33.16,28.83 C1.1
N1771286: length 3.7
  TOP w0.254: U1.3 34.64,31.18 34.83,30.99 R4.2 R2.1
N1771536: length 2.3
  TOP w0.254: R1.1 29.86,31.37 30.05,31.18 U1.4
N1781404: length 3.5
  BOTTOM w0.254: R19.2 27.13,28.96 26.93,29.15 U5.9
N1798198: length 1.5
  TOP w0.508: R3.1 40.97,25.21 D4.1
N1800565: length 14.6
  BOTTOM w0.254: U3.4 29.68,40.77 29.3,41.15 24.27,41.15 20.98,37.86 20.98,34.42
N1800577: length 11.5
  BOTTOM w0.254: U3.3 30.21,38.23 29.83,38.61 29.83,39.39 28.58,40.64 24.52,40.64 22.73,38.85 22.73,37.46
N16974520: length 1.5
  BOTTOM w0.254: R16.2 29.92,35.05 29.77,34.9 U5.1
N17183070: length 3.7
  BOTTOM w0.254: R11.2 34.34,43.69 36.17,41.86 U3.1
N17216350: length 1.8
  BOTTOM w0.254: Q4.1 45.03,11.25 45.53,11.75 45.59,11.75 45.66,11.81 R26.2
N169745210: length 6.6
  BOTTOM w0.254: U5.11 25.93,27.29 26.81,26.42 R17.2

## Copper pours and planes (outline as drawn; the poured copper is in the pictures)
GND on TOP: 33.67,42.16 36.65,42.16 45.85,26.24 45.84,26.24 42.63,31.81 42.52,31.83 42.46,31.73 42.46,30.92 42.31,30.92 42.31,30.8 42.46,30.8 42.46,30.12 42.98,29.59 42.98,29.23 43.04,29.14 43.14,29.15 43.69,29.18 43.98,28.72 43.98,28.7 44.72,27.97 44.72,25.72 44.43,21.78 48.38,21.86 52.72,14.35 52.72,9.14 52.18,7.99 51.07,7.37 43.95,7.37 43.25,7.44 42.6,7.71 41.03,8.81 39.25,9.53 37.29,9.78 35.32,9.53 35.32,0.25 4.56,0.25 0.91,2.4 0.82,6.63 14.74,30.73 17.92,30.73 17.92,32.13 19.44,33.66 19.44,37.34 22.24,40.13 22.24,41.91 22.75,42.42 25.41,42.42 25.16,42.67 25.16,45.97 25.92,45.97 26.94,46.99 26.94,51.7 29.09,52.67 31.2,51.62 31.58,50.95 31.61,50.88 31.64,50.8 31.65,50.83 33.37,47.84 32.4,46.86 32.4,45.21 32.52,45.09 33.41,45.09 34.43,44.07 34.43,43.18 33.67,42.42 ; 20 cut-outs
GND on BOTTOM: 4.56,0.25 0.91,2.4 0.82,6.63 26.62,51.3 29.01,52.21 31.38,51.25 52.72,14.34 52.72,9.14 52.22,8.02 51.19,7.37 43.7,7.37 43.11,7.48 42.57,7.74 42.4,7.89 42.23,8.04 42.14,8.14 42.05,8.26 42.01,8.21 40.7,9 39.25,9.53 37.29,9.78 35.32,9.53 35.32,0.25 ; 23 cut-outs

## Text on the board
Ref Des/Silkscreen Bottom: WaterDetector_ver1.0.0
DEVICE_TYPE_BOTTOM: FIGURE | SIZE | 12.0 | 35.0 | 40.0 | 43.3 | 50.0 | 51.2 | 55.0 | 59.1 | 65.0 | 120.0 | DRILL CHART: TOP to BOTTOM | ALL UNITS ARE IN MILS | TOLERANCE | +0.0/-0.0 | +5.0/-0.0 | PLATED | QTY | 116 | 1 | 4 | 6 | 5 | 2 | 3
